# EAGLE board dc_q84 v3 (EAGLE 9.7.0)
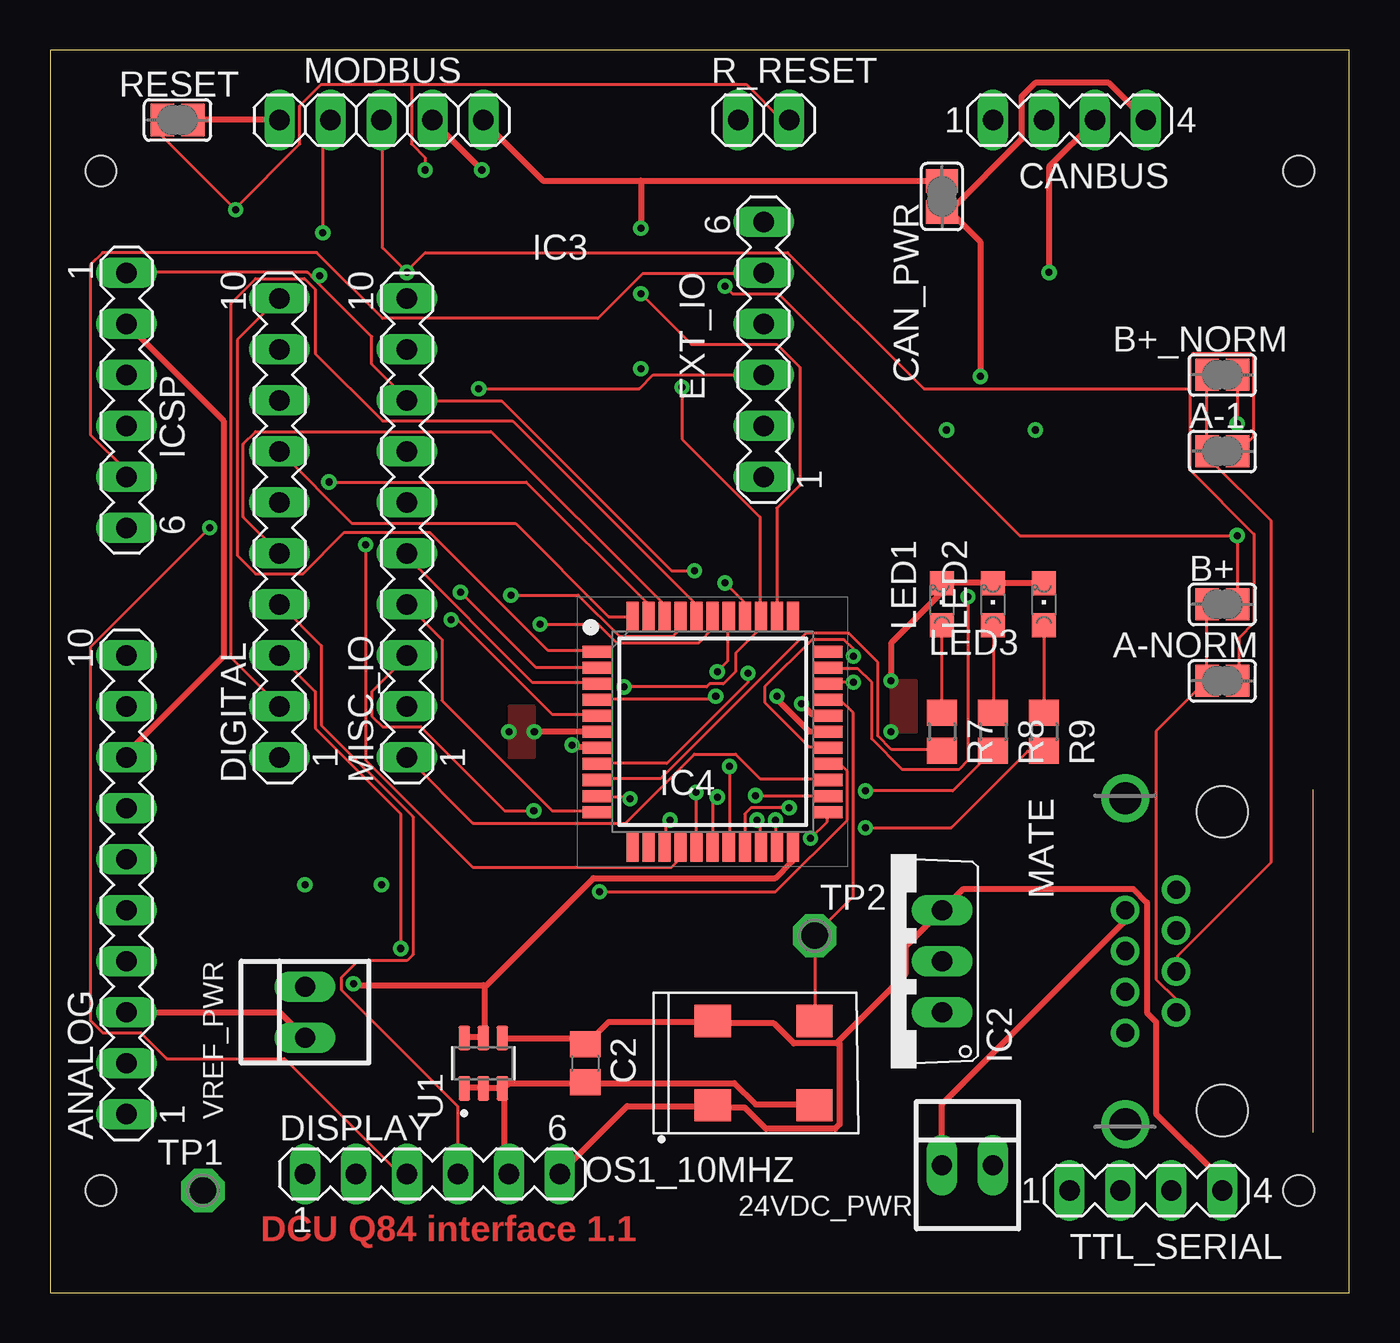
[diagram p0: board, top side]
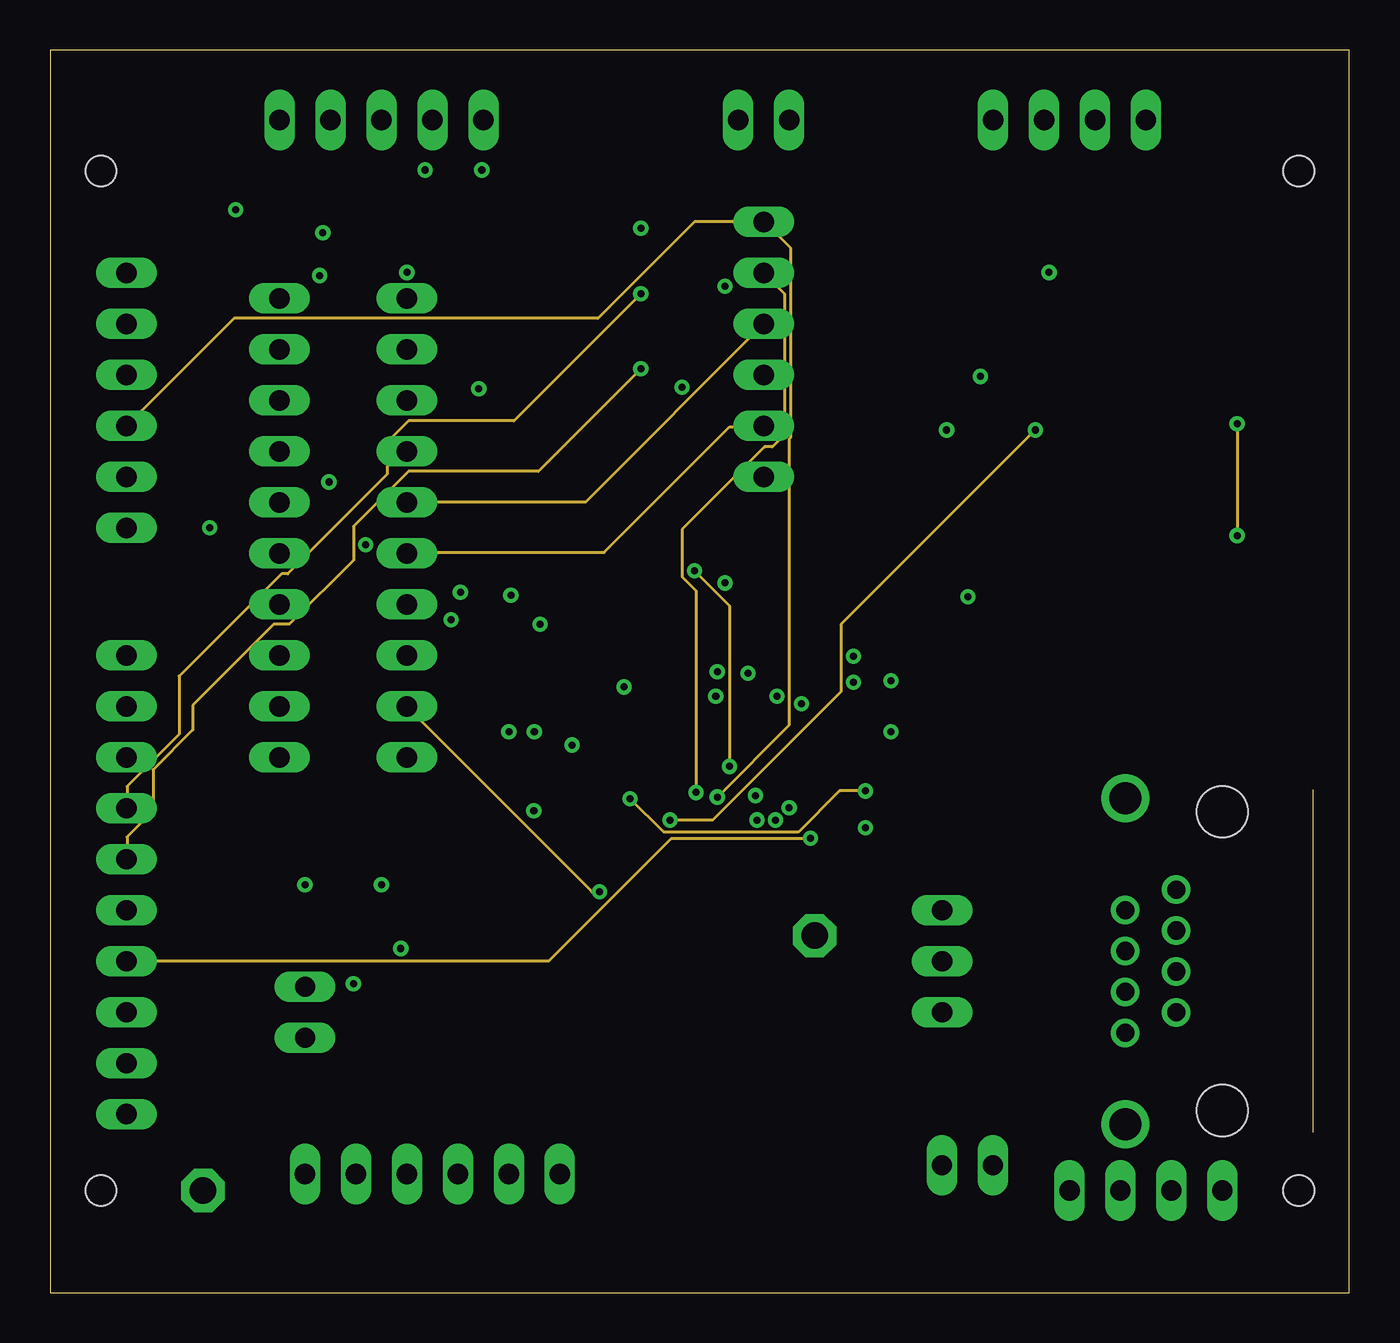
[diagram p1: board, inner layer Route2]
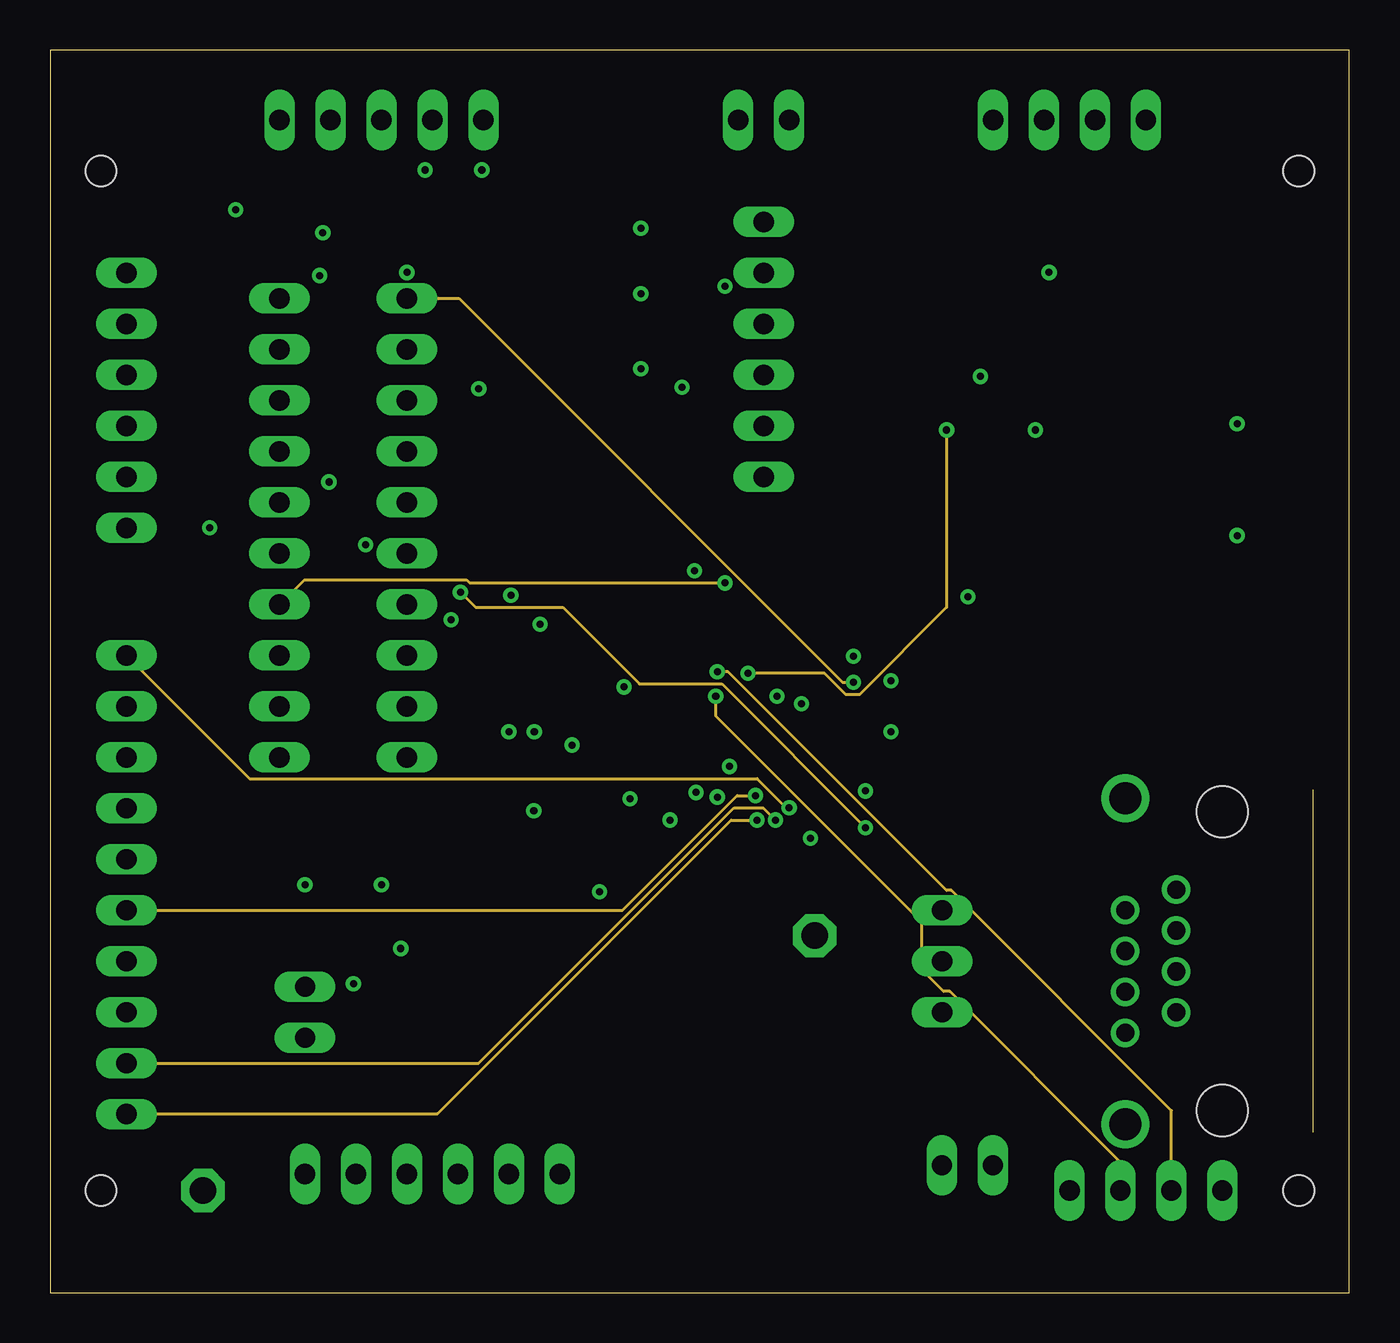
[diagram p2: board, inner layer Route15]
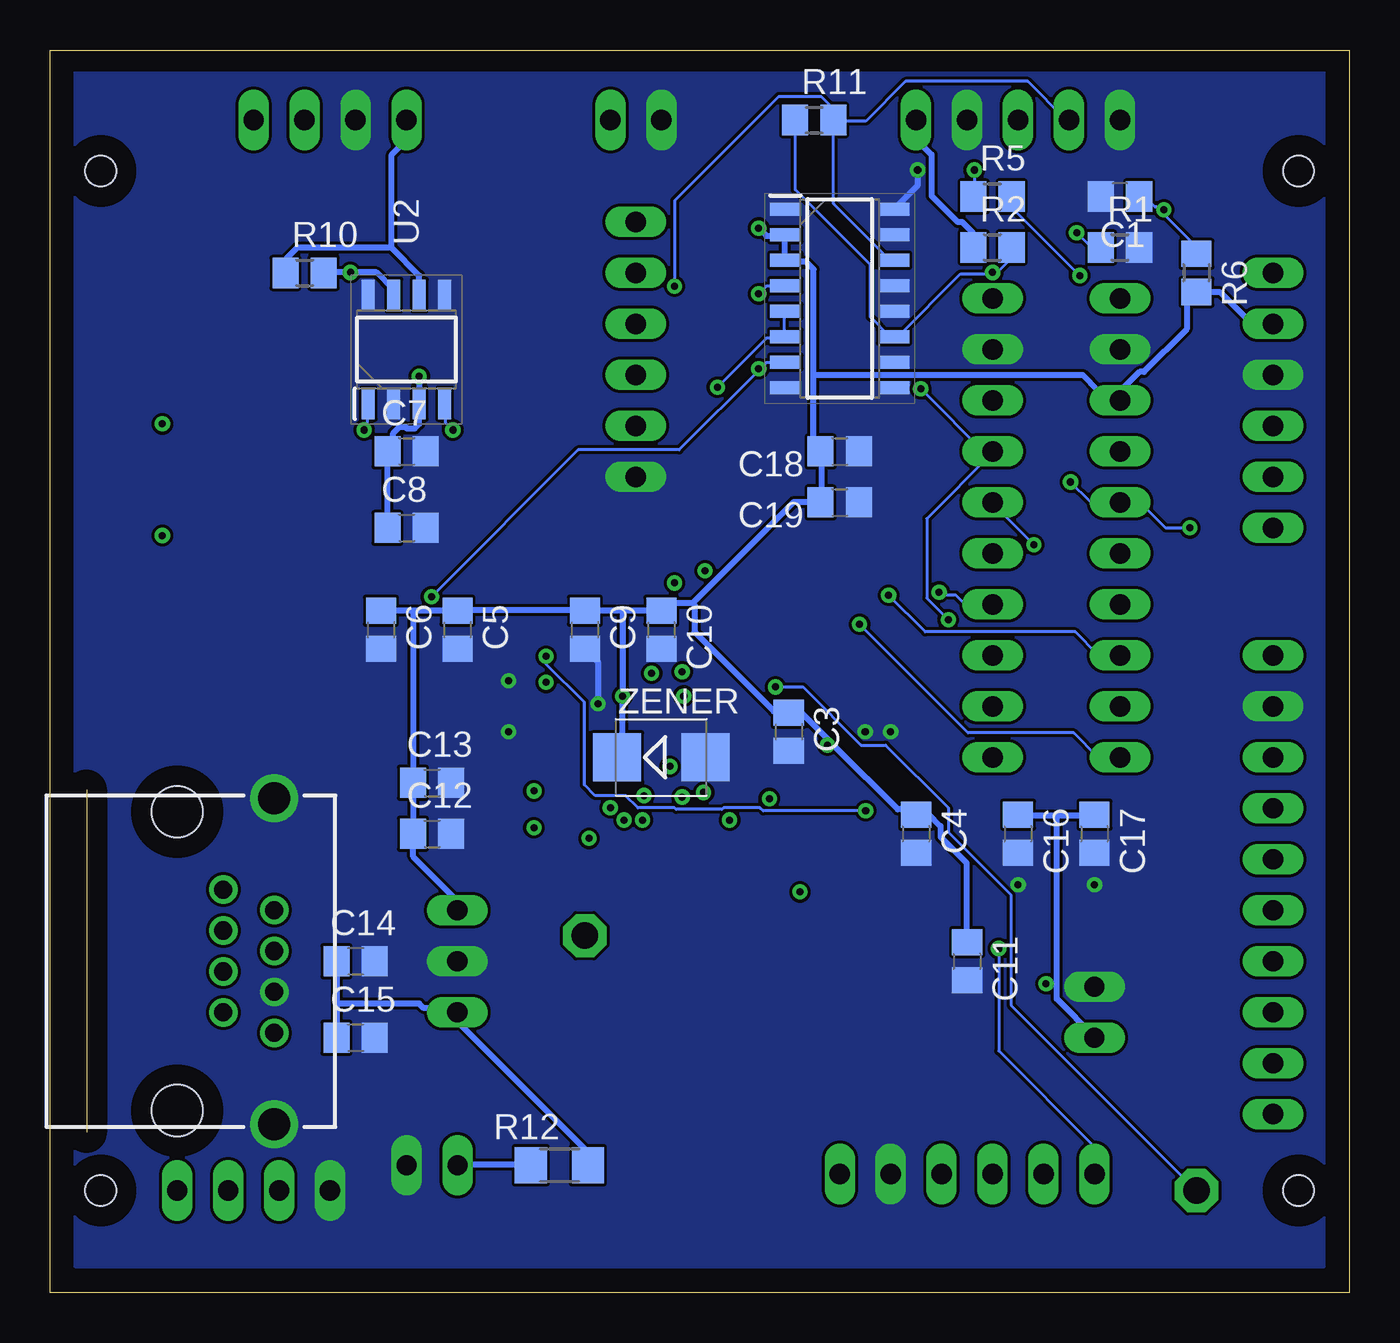
[diagram p3: board, bottom side, seen from below]

Size 64.75 x 61.9 mm. Coordinates in mm from the lower left corner, seen from the top.
Outline: 0,0 64.75,0 64.75,61.9 0,61.9 0,0
Copper layers (1+2*15+16): Top 0.035mm / dielectric 1.5mm / Route2 0.035mm / dielectric 0.15mm / Route15 0.035mm / dielectric 0.2mm / Bottom 0.035mm
Design rules "Fusion Electronics Design Rules": minimum track width 6mil, minimum drill 0.35mm, track to track 6mil, track to pad 6mil, pad to pad 6mil, via to via 6mil, smd to smd 6mil, copper to edge 40mil, drill to drill 6mil, minimum pad ring 10mil, minimum via ring 8mil, stop-mask expansion 4mil, vias tented up to drill 0mil, thermal gap 10mil
Net classes: 1 icurrent: width 0.305 mm
Holes 1.52 mm at 2.54,55.88 62.23,55.88 2.54,5.08 62.23,5.08
vRestrict: area 29.2,26.7 to 36.8,29.2

## Footprints (pad centres in the part's own frame; a part is rotated, then mirrored left to right if it is on the bottom)
22-23-2021 = drill 1 long: 1 -1.27,0; 2 1.27,0
SJ = smd 1.168 x 1.6: 1 -0.762,0; 2 0.762,0
MA10-1 = drill 1.016 long: 1 -11.43,0; 2 -8.89,0; 3 -6.35,0; 4 -3.81,0; 5 -1.27,0; 6 1.27,0; 7 3.81,0; 8 6.35,0; 9 8.89,0; 10 11.43,0
C0805 = smd 1.3 x 1.5: 1 -0.95,0; 2 0.95,0
MA04-1 = drill 1.016 long: 1 -3.81,0; 2 -1.27,0; 3 1.27,0; 4 3.81,0
MA06-1 = drill 1.016 long: 1 -6.35,0; 2 -3.81,0; 3 -1.27,0; 4 1.27,0; 5 3.81,0; 6 6.35,0
TO220V = drill 1.016 long: 1 -2.54,-2.54; 2 0,-2.54; 3 2.54,-2.54
SOIC127P600X175-16N = smd 1.525 x 0.65: 1 -2.712,4.445; 2 -2.712,3.175; 3 -2.712,1.905; 4 -2.712,0.635; 5 -2.712,-0.635; 6 -2.712,-1.905; 7 -2.712,-3.175; 8 -2.712,-4.445; 9 2.712,-4.445; 10 2.712,-3.175; 11 2.712,-1.905; 12 2.712,-0.635; 13 2.712,0.635; 14 2.712,1.905; 15 2.712,3.175; 16 2.712,4.445
QFP80P1200X1200X120-44N = smd 1.475 x 0.6: 1 -5.738,4; 2 -5.738,3.2; 3 -5.738,2.4; 4 -5.738,1.6; 5 -5.738,0.8; 6 -5.738,0; 7 -5.738,-0.8; 8 -5.738,-1.6; 9 -5.738,-2.4; 10 -5.738,-3.2; 11 -5.738,-4; 23 5.738,-4; 24 5.738,-3.2; 25 5.738,-2.4; 26 5.738,-1.6; 27 5.738,-0.8; 28 5.738,0; 29 5.738,0.8; 30 5.738,1.6; 31 5.738,2.4; 32 5.738,3.2; 33 5.738,4 | smd 0.6 x 1.475: 12 -4,-5.738; 13 -3.2,-5.738; 14 -2.4,-5.738; 15 -1.6,-5.738; 16 -0.8,-5.738; 17 0,-5.738; 18 0.8,-5.738; 19 1.6,-5.738; 20 2.4,-5.738; 21 3.2,-5.738; 22 4,-5.738; 34 4,5.738; 35 3.2,5.738; 36 2.4,5.738; 37 1.6,5.738; 38 0.8,5.738; 39 0,5.738; 40 -0.8,5.738; 41 -1.6,5.738; 42 -2.4,5.738; 43 -3.2,5.738; 44 -4,5.738
CHIPLED_0805 = smd 1.2 x 1.2: A 0,-1.05; C 0,1.05
GLX-S-88M = drill 0.9 pad 1.422: 1 -3.57,-2.3; 2 -2.55,-4.84; 3 -1.53,-2.3; 4 -0.51,-4.84; 5 0.51,-2.3; 6 1.53,-4.84; 7 2.55,-2.3; 8 3.57,-4.84 | drill 1.6 pad 2.184: S1 -8.125,-4.84; S2 8.125,-4.84 | hole 2.55: -7.44,0; 7.44,0
1X05 = drill 1.016 long: 1 -5.08,0; 2 -2.54,0; 3 0,0; 4 2.54,0; 5 5.08,0
7.2X5.2-4-PAD = smd 1.8 x 1.6: 1 -2.54,-2.1; 2 2.54,-2.1; 3 2.54,2.1; 4 -2.54,2.1
R0805 = smd 1.3 x 1.5: 1 -0.95,0; 2 0.95,0
R1206 = smd 1.6 x 1.803: 1 -1.422,0; 2 1.422,0
1X02 = drill 1.016 long: 1 -1.27,0; 2 1.27,0
P1-13 = drill 1.321 pad 2.159 octagon: TP 0,0
SOT95P280X145-6N = smd 1.21 x 0.58: 1 -1.255,0.95; 2 -1.255,0; 3 -1.255,-0.95; 4 1.255,-0.95; 5 1.255,0; 6 1.255,0.95
SOIC127P600X175-8N = smd 1.528 x 0.65: 1 -2.711,1.905; 2 -2.711,0.635; 3 -2.711,-0.635; 4 -2.711,-1.905; 5 2.711,-1.905; 6 2.711,-0.635; 7 2.711,0.635; 8 2.711,1.905
SMB = smd 2.4 x 2.4: A 2.2,0; C -2.2,0

## Placement (x,y rotation side)
24VDC_PWR  24vdc power  [22-23-2021]  45.72,6.35 0 top
A-1  A-  [SJ]  58.42,41.91 0 top
A-NORM  A-norm  [SJ]  58.42,30.48 0 top
ANALOG  Analog  [MA10-1]  3.81,20.32 90 top
B+  B+  [SJ]  58.42,34.29 0 top
B+_NORM  B+norm  [SJ]  58.42,45.72 0 top
C1  0.1uf  [C0805]  11.43,54.61 180 bottom
C2  0.1uf  [C0805]  26.67,11.43 270 top
C3  0.1uf  [C0805]  27.94,27.94 270 bottom
C4  10uf  [C0805]  21.59,22.86 270 bottom
C5  0.1uf  [C0805]  44.45,33.02 270 bottom
C6  10uf  [C0805]  48.26,33.02 270 bottom
C7  0.1uf  [C0805]  46.99,41.91 0 bottom
C8  10uf  [C0805]  46.99,38.1 0 bottom
C9  0.1uf  [C0805]  38.1,33.02 270 bottom
C10  10uf  [C0805]  34.29,33.02 270 bottom
C11  0.1uf  [C0805]  19.05,16.51 270 bottom
C12  0.1uf  [C0805]  45.72,22.86 0 bottom
C13  10uf  [C0805]  45.72,25.4 0 bottom
C14  0.1uf  [C0805]  49.53,16.51 0 bottom
C15  10uf  [C0805]  49.53,12.7 0 bottom
C16  0.1uf  [C0805]  16.51,22.86 270 bottom
C17  10uf  [C0805]  12.7,22.86 270 bottom
C18  0.1uf  [C0805]  25.4,41.91 0 bottom
C19  10uf  [C0805]  25.4,39.37 0 bottom
CAN_PWR  CAN_PWR  [SJ]  44.45,54.61 90 top
CANBUS  CANBUS  [MA04-1]  50.8,58.42 0 top
DIGITAL  Digtal  [MA10-1]  11.43,38.1 90 top
DISPLAY  DISPLAY  [MA06-1]  19.05,5.91 0 top
EXT_IO  EXT_IO  [MA06-1]  35.56,46.99 90 top
IC2  7805TV  [TO220V]  41.91,16.51 90 top
IC3  ADM3095EBRZ  [SOIC127P600X175-16N]  25.4,49.53 0 bottom
IC4  PIC18F47Q84-I_PT  [QFP80P1200X1200X120-44N]  33.02,27.94 0 top
ICSP  ICSP  [MA06-1]  3.81,44.45 270 top
LED1  run  [CHIPLED_0805]  44.45,34.29 0 top
LED2  error  [CHIPLED_0805]  46.99,34.29 0 top
LED3  comm  [CHIPLED_0805]  49.53,34.29 0 top
MATE  GLX-S-88M  [GLX-S-88M]  58.42,16.51 270 top
MISC_IO  misc-io  [MA10-1]  17.78,38.1 90 top
MODBUS  MODBUS  [1X05]  16.51,58.42 0 top
OS1_10MHZ  OSC-OE-CFPS-72  [7.2X5.2-4-PAD]  35.56,11.43 0 top
R1  680  [R0805]  11.43,52.07 0 bottom
R2  680  [R0805]  17.78,52.07 0 bottom
R5  56ohm  [R0805]  17.78,54.61 0 bottom
R6  10k  [R0805]  7.62,50.8 270 bottom
R7  1k  [R0805]  44.45,27.94 270 top
R8  1k  [R0805]  46.99,27.94 270 top
R9  1k  [R0805]  49.53,27.94 270 top
R10  120ohm  [R0805]  52.07,50.8 0 bottom
R11  120  [R0805]  26.67,58.42 0 bottom
R12  0 ohm fuse  [R1206]  39.37,6.35 180 bottom
R_RESET  remote_reset  [1X02]  35.56,58.42 0 top
RESET  reset  [SJ]  6.35,58.42 0 top
TP1  PTR1PAD1-13  [P1-13]  7.62,5.08 0 top
TP2  PTR1PAD1-13  [P1-13]  38.1,17.78 0 top
TTL_SERIAL  TTL Serial  [MA04-1]  54.61,5.08 0 top
U1  REF3440IDBVR  [SOT95P280X145-6N]  21.59,11.43 90 top
U2  TCAN330GDR  [SOIC127P600X175-8N]  46.99,46.99 90 bottom
VREF_PWR  5vdc_vref_pwr  [22-23-2021]  12.7,13.97 90 top
ZENER  5.6V  [SMB]  34.29,26.67 0 bottom

## Library data of the parts
24VDC_PWR VREF_PWR = con-molex; MF: MOLEX; MPN: 22-23-2021; OC_FARNELL: 1462926; OC_NEWARK: 25C3832
A-1 A-NORM B+ B+_NORM CAN_PWR RESET = jumper
ANALOG CANBUS DIGITAL DISPLAY EXT_IO ICSP MISC_IO TTL_SERIAL = con-lstb; OC_FARNELL: unknown; OC_NEWARK: unknown
C1-C19 = rcl; SPICEPREFIX: C
IC2 = linear
IC3 = ADM3095EBRZ; DESCRIPTION: Level 4 EMC Protected RS-485 Transceiver with Full +/-42 V Fault Protection; HEIGHT: 1.75mm; MANUFACTURER_NAME: Analog Devices; MANUFACTURER_PART_NUMBER: ADM3095EBRZ; MOUSER_PART_NUMBER: 584-ADM3095EBRZ; MOUSER_PRICE-STOCK: https://www.mouser.com/Search/Refine.aspx?Keyword=584-ADM3095EBRZ
IC4 = PIC18F47Q84-I_PT; DESCRIPTION: 8-bit Microcontrollers - MCU CAN-FD, 128KB Flash, 13KB RAM, 12b ADC3, UTMR, DAC, Comp, PWM, CCP, CWG, HLT, WWDT, SCAN/CRC, ZCD, PPS,Comms IDLE/DOZE/PMD, JTAG; HEIGHT: 1.2mm; MANUFACTURER_NAME: Microchip; MANUFACTURER_PART_NUMBER: PIC18F47Q84-I/PT; MOUSER_PART_NUMBER: 579-PIC18F47Q84-I/PT; MOUSER_PRICE-STOCK: https://www.mouser.co.uk/ProductDetail/Microchip-Technology/PIC18F47Q84-I-PT?qs=d0WKAl%252BL4KYthTnAmf%2FYSg%3D%3D
LED1-LED3 = led
MATE = con-kycon; OC_FARNELL: unknown; OC_NEWARK: unknown
MODBUS R_RESET = pinhead
OS1_10MHZ = IQD-Frequency-Products
R1 R2 R5-R12 = rcl; SPICEPREFIX: R
TP1 TP2 = testpad
U1 = REF3440IDBVR; AVAILABILITY: In Stock; DESCRIPTION: 4.1-V, low-drift, low-power, small-footprint series voltage reference; MF: Texas Instruments; MP: REF3440IDBVR; PACKAGE: SOT-23-6 Texas Instruments; PRICE: None; PURCHASE-URL: https://pricing.snapeda.com/search/part/REF3440IDBVR/?ref=eda
U2 = TCAN330GDR; DESCRIPTION: 3.3-V CAN Transceivers with CAN FD (Flexible Data Rate); HEIGHT: 1.75mm; MANUFACTURER_NAME: Texas Instruments; MANUFACTURER_PART_NUMBER: TCAN330GDR; MOUSER_PART_NUMBER: 595-TCAN330GDR; MOUSER_PRICE-STOCK: https://www.mouser.co.uk/ProductDetail/Texas-Instruments/TCAN330GDR?qs=9DwIlvx97adeWwzxdqwSPw%3D%3D
ZENER = diode

## Nets
AN0: ANALOG.10 IC4.19
AN1: ANALOG.1 IC4.20
AN2: ANALOG.2 IC4.21
AN4: ANALOG.4 IC4.23
AN5: ANALOG.5 IC4.24
CAN_N [icurrent]: CANBUS.1 R10.1 U2.6
CAN_P [icurrent]: CANBUS.3 R10.2 U2.7
CAN_VCC [icurrent]: C7.1 C8.1 CAN_PWR.1 CANBUS.4 U2.3
CANRX: IC4.8 U2.4
CANTX: IC4.14 U2.1
CLOCKO: IC4.31 MISC_IO.10
CPU_CLK: IC4.30 OS1_10MHZ.3 TP2.TP
CS: DIGITAL.3 DISPLAY.1 IC4.41
DB0: DIGITAL.1 IC4.39
DB1: DIGITAL.2 IC4.40
DERE: IC3.5 IC3.6 IC4.36 TP1.TP
DLED: IC4.2 IC4.11 MISC_IO.4 R9.2
MB_A: A-1.2 A-NORM.2 IC3.11 MODBUS.3 R2.2 R11.1
MB_B: B+.2 B+_NORM.2 IC3.14 MODBUS.2 R1.1 R11.2
MB_RX: ANALOG.6 IC3.7 IC4.32
MB_TX: ANALOG.7 IC3.4 IC4.35
MCLR_SIG: IC4.18 ICSP.1 MISC_IO.8 R5.2
MISC: IC4.26 MISC_IO.2
MLED: IC4.9 R7.2
N$1: A-NORM.1 B+.1 MATE.7
N$2 [icurrent]: C14.1 C15.1 IC2.1 R12.1
N$3: A-1.1 B+_NORM.1 MATE.5
N$4: LED1.A R7.1
N$5: LED2.A R8.1
N$6: LED3.A R9.1
PC_RX2: IC4.38 TTL_SERIAL.3
PC_TX2: IC4.4 TTL_SERIAL.2
PGC: EXT_IO.5 IC4.16 ICSP.5
PGD: EXT_IO.6 IC4.17 ICSP.4
R_RESET: C1.1 R5.1 R6.1 R_RESET.2 RESET.1
RB5: EXT_IO.4 IC4.15 MISC_IO.6
RD5: EXT_IO.2 IC4.3 MISC_IO.5
RD7: EXT_IO.3 IC4.5 MISC_IO.7
RE2: IC4.27 MISC_IO.3
RELAY: IC4.25 MISC_IO.1
RLED: IC4.10 R8.2
SCK1: DIGITAL.4 DISPLAY.4 IC4.37
SDI1: DIGITAL.5 IC4.42
SDO1: DIGITAL.6 DISPLAY.3 IC4.43
UC_RX: DIGITAL.10 IC4.1
UC_TX: DIGITAL.7 IC4.44
V+ [icurrent]: 24VDC_PWR.1 MATE.2 R12.2
VDD [icurrent]: ANALOG.8 C2.1 C3.1 C4.1 C5.1 C6.1 C9.1 C10.1 C11.1 C12.1 C13.1 C18.1 C19.1 CAN_PWR.2 DIGITAL.8 DISPLAY.6 IC2.3 IC3.2 IC3.3 IC4.7 IC4.28 ICSP.2 MODBUS.5 OS1_10MHZ.1 OS1_10MHZ.4 R2.1 R6.2 TTL_SERIAL.4 U1.4 ZENER.C
VREF [icurrent]: ANALOG.3 C16.1 C17.1 IC4.22 U1.5 U1.6 VREF_PWR.1
VSS [icurrent]: 24VDC_PWR.2 ANALOG.9 C1.2 C2.2 C3.2 C4.2 C5.2 C6.2 C7.2 C8.2 C9.2 C10.2 C11.2 C12.2 C13.2 C14.2 C15.2 C16.2 C17.2 C18.2 C19.2 CANBUS.2 DIGITAL.9 DISPLAY.5 EXT_IO.1 IC2.2 IC3.1 IC3.8 IC3.9 IC3.10 IC3.12 IC3.13 IC3.15 IC3.16 IC4.6 IC4.29 ICSP.3 LED1.C LED2.C LED3.C MATE.6 MATE.S1 MATE.S2 MISC_IO.9 MODBUS.1 MODBUS.4 OS1_10MHZ.2 R1.2 R_RESET.1 RESET.2 TTL_SERIAL.1 U1.1 U1.2 U1.3 U2.2 U2.5 U2.8 VREF_PWR.2 ZENER.A

## Tracks (layer width: path | path; a pad name or v marks a point on that pad's centre or on a via)
AN0  (via drill 0.35)
  Top 0.152: v36.83,24.16 34.92,24.16 34.62,23.85 34.62,22.25 IC4.19
  Route15 0.152: v36.83,24.16 36.68,24.16 35.23,25.6 9.93,25.6 3.84,31.7 ANALOG.10
AN1  (via drill 0.35)
  Top 0.152: v35.23,23.55 35.38,23.39 35.38,22.25 IC4.20
  Route15 0.152: v35.23,23.55 33.93,23.55 19.3,8.92 3.84,8.92 ANALOG.1
AN2  (via drill 0.35)
  Top 0.152: v36.14,23.55 36.14,22.25 IC4.21
  Route15 0.152: v36.14,23.55 35.53,24.16 34.09,24.16 21.36,11.43 ANALOG.2
AN4  (via drill 0.35)
  Top 0.152: v37.9,22.63 38.73,23.47 38.73,23.93 IC4.23
  Route2 0.152: v37.9,22.63 30.96,22.63 24.87,16.53 3.84,16.53 ANALOG.4
AN5  (via drill 0.35)
  Top 0.152: v35.15,24.77 38.73,24.77 IC4.24
  Route15 0.152: v35.15,24.77 34.24,24.77 28.52,19.05 ANALOG.5
CAN_N
  Bottom 0.305: 47.73,52.04 52.45,52.04 52.98,51.51 52.98,50.82 R10.1 | 47.73,52.04 46.36,50.67 U2.6 | 47.73,52.04 47.73,56.69 47.04,57.38 47.04,58.37 CANBUS.1
CAN_P  (via drill 0.35)
  Top 0.305: v49.78,50.82 49.78,56.08 52.07,58.37 CANBUS.3
  Bottom 0.305: R10.2 51.08,50.82 v49.78,50.82 48.49,50.82 47.65,49.99 47.65,49.76 U2.7
CAN_VCC  (via drill 0.35)
  Top 0.305: CANBUS.4 52.76,60.27 49.1,60.27 48.41,59.59 48.41,57.45 44.83,53.87 44.45,53.87 CAN_PWR.1 44.91,53.8 46.36,52.35 v46.36,45.64
  Bottom 0.305: C8.1 47.95,38.1 47.95,41.91 C7.1 47.8,41.99 47.65,42.14 47.65,42.82 47.35,43.13 47.04,43.13 46.97,43.05 46.58,43.05 46.36,43.28 U2.3 v46.36,45.64
CANRX  (via drill 0.35)
  Top 0.152: v34.77,30.86 34.77,30.4 30.73,26.36 27.31,26.36 IC4.8
  Route15 0.152: v34.77,30.86 38.58,30.86 39.65,29.79 40.34,29.79 44.68,34.14 v44.68,42.98
  Bottom 0.152: v44.68,42.98 45.06,43.36 45.06,44.27 U2.4
CANTX  (via drill 0.35)
  Top 0.152: v30.89,23.55 30.66,23.32 30.66,22.25 IC4.14
  Route2 0.152: v30.89,23.55 33.02,23.55 39.42,29.95 39.42,33.3 v49.1,42.98
  Bottom 0.152: v49.1,42.98 49.1,43.2 48.95,43.36 48.95,44.27 U2.1
CLOCKO  (via drill 0.35)
  Top 0.152: v40.03,30.4 38.81,30.4 IC4.31
  Route15 0.152: v40.03,30.4 39.5,30.4 20.37,49.53 MISC_IO.10
CPU_CLK
  Top 0.152: IC4.30 38.81,29.49 39.42,29.49 40.03,28.88 40.03,19.74 38.12,17.83 TP2.TP 38.12,17.75 38.12,13.56 OS1_10MHZ.3
CS  (via drill 0.35)
  Top 0.152: v22.96,34.75 26.31,34.75 28.37,32.69 31.04,32.69 31.42,33.07 31.42,33.6 IC4.41 | v17.48,17.14 17.48,23.85 13.21,28.12 13.21,29.95 11.45,31.7 DIGITAL.3
  Bottom 0.152: v22.96,34.75 21.13,32.92 13.67,32.92 12.52,31.77 11.45,31.77 DIGITAL.3 | v17.48,17.14 17.48,12.04 12.75,7.31 12.75,5.94 DISPLAY.1
DB0  (via drill 0.35)
  Top 0.152: IC4.39 33.02,33.07 32.33,32.38 28.22,32.38 27.31,33.3 v24.41,33.3
  Bottom 0.152: v24.41,33.3 19,27.89 13.74,27.89 12.52,26.67 DIGITAL.1
DB1
  Top 0.152: DIGITAL.2 9.02,31.62 9.02,49.3 10.24,50.52 12.67,50.52 13.21,49.99 13.21,46.79 16.56,43.43 23.04,43.43 32.18,34.29 32.18,33.68 IC4.40
DERE  (via drill 0.35)
  Top 0.152: v31.5,45.11 31.5,42.52 35.38,38.63 35.38,33.68 IC4.36 35.38,33.6 35.38,33.07 34.16,31.85 34.16,30.94 33.55,30.33 32.87,30.33 32.72,30.17 v28.6,30.17
  Bottom 0.152: v31.5,45.11 29.06,47.55 28.22,47.55 28.14,47.62 | 28.14,47.62 28.14,48.84 IC3.5 | 28.14,47.62 IC3.6 | TP1.TP 16.87,14.33 16.87,19.81 19.99,22.94 19.99,24.16 23.11,27.28 24.33,27.28 27.23,30.17 v28.6,30.17
DLED  (via drill 0.35)
  Top 0.152: MISC_IO.4 19.53,32.54 19.53,29.49 25.02,24 27.23,24 IC4.11 | v20.45,34.9 24.18,31.17 27.23,31.17 IC4.2 | v40.64,23.16 44.91,23.16 48.72,26.98 49.48,26.98 R9.2
  Route15 0.152: v40.64,23.16 33.48,30.33 29.36,30.33 25.55,34.14 21.21,34.14 v20.45,34.9
  Bottom 0.152: v20.45,34.9 20.3,34.75 19.61,34.75 19.15,34.29 MISC_IO.4
MB_A  (via drill 0.35)
  Top 0.152: 56.79,45.03 56.79,46.63 56.95,46.79 59.84,46.79 60,46.63 60,42.67 59.23,41.91 A-1.2 | 56.79,45.03 56.79,41 60,37.79 60,33.38 59.23,32.61 59.23,30.48 A-NORM.2 | MODBUS.3 16.56,58.37 16.56,52.04 v17.78,50.82 17.78,50.9 18.69,51.82 36.75,51.82 43.54,45.03 56.79,45.03
  Bottom 0.152: 17.78,50.75 19.38,50.75 22.5,47.62 IC3.11 22.89,47.62 23.88,48.62 23.88,51.21 27.61,54.94 27.61,58.37 R11.1 | 17.78,50.75 17.63,50.75 16.87,51.51 16.87,52.04 R2.2 | 17.78,50.75 v17.78,50.82
MB_B  (via drill 0.35)
  Top 0.152: v59.16,43.28 59.16,45.72 B+_NORM.2 | B+.2 59.16,34.29 v59.16,37.72 48.34,37.72 36.3,49.76 34.01,49.76 v33.63,50.14 | v13.59,52.81 13.59,57.99 13.97,58.37 MODBUS.2
  Route2 0.152: v59.16,43.28 v59.16,37.72
  Bottom 0.152: IC3.14 22.89,51.43 25.7,54.25 25.7,58.37 R11.2 | v13.59,52.81 12.9,52.12 12.45,52.12 R1.1 | R11.2 25.63,58.37 24.11,58.37 22.12,60.35 16.03,60.35 14.12,58.45 13.97,58.45 MODBUS.2 | v33.63,50.14 33.63,54.41 28.45,59.59 26.31,59.59 25.78,59.05 25.78,58.45 R11.2
MB_RX  (via drill 0.35)
  Top 0.152: v45.75,34.67 45.75,26.52 45.29,26.06 42.47,26.06 40.95,27.58 40.95,30.4 40.26,31.09 38.81,31.09 IC4.32
  Route2 0.152: v29.44,46.02 24.33,40.92 17.86,40.92 15.11,38.18 15.11,36.5 11.91,33.3 11.15,33.3 7.11,29.26 7.11,28.04 5.13,26.06 5.13,24 3.84,22.71 3.84,21.64 ANALOG.6
  Bottom 0.152: v45.75,34.67 38.43,41.99 33.4,41.99 29.4,45.99 | 29.4,45.99 29.06,46.33 28.14,46.33 IC3.7 | v29.44,46.02 29.4,45.99
MB_TX  (via drill 0.35)
  Top 0.152: v29.44,49.76 31.95,47.24 36.22,47.24 37.36,46.1 37.36,40.23 36.22,39.09 IC4.35
  Route2 0.152: v29.44,49.76 23.11,43.43 17.86,43.43 16.79,42.37 16.79,40.77 11.84,35.81 11.53,35.81 6.43,30.71 6.43,27.81 3.84,25.22 3.84,24.16 ANALOG.7
  Bottom 0.152: v29.44,49.76 29.06,50.14 28.14,50.14 IC3.4
MCLR_SIG  (via drill 0.35)
  Top 0.152: v33.86,26.21 33.86,22.25 IC4.18 | v32.11,35.97 30.96,35.97 22.5,44.42 17.78,44.42 MISC_IO.8 17.78,44.5 16.03,46.25 16.03,47.62 13.21,50.44 | 13.21,50.44 12.83,50.82 3.84,50.82 ICSP.1 | 13.21,50.44 v13.44,50.67
  Route2 0.152: v33.86,26.21 33.86,34.21 v32.11,35.97
  Bottom 0.152: 4.75,50.82 3.84,50.82 ICSP.1 | 16.79,54.63 R5.2 16.79,54.56 16.79,54.03 v13.44,50.67
MISC  (via drill 0.35)
  Top 0.152: v27.38,19.96 36.14,19.96 39.73,23.55 39.73,25.98 39.42,26.29 38.81,26.29 IC4.26
  Route2 0.152: v27.38,19.96 27,19.96 17.78,29.18 MISC_IO.2
MLED
  Top 0.152: IC4.9 27.31,25.6 30.43,25.6 37.67,32.84 39.8,32.84 41.25,31.39 41.25,27.74 41.94,27.05 44.45,27.05 R7.2
N$1
  Top 0.152: 57.63,30.48 57.63,34.29 B+.1 | 57.63,30.48 55.12,27.96 55.12,15.62 56.11,14.63 56.11,14.02 MATE.7 | 57.63,30.48 A-NORM.1
N$2
  Bottom 0.305: 50.47,14.4 50.47,16.46 C14.1 | 50.47,14.4 50.47,12.72 C15.1 | R12.1 37.97,6.4 37.97,7.01 44.45,13.49 IC2.1 44.53,14.1 44.6,14.17 46.13,14.17 46.36,14.4 50.47,14.4
N$3
  Top 0.152: B+_NORM.1 57.63,45.72 57.63,41.91 A-1.1 57.71,41.91 57.71,41.6 60.83,38.48 60.83,21.41 56.19,16.76 56.19,16 MATE.5
N$4
  Top 0.152: R7.1 LED1.A
N$5
  Top 0.152: LED2.A 47.04,33.22 47.04,28.96 R8.1
N$6
  Top 0.152: LED3.A 49.56,33.22 49.56,28.96 R9.1
PC_RX2  (via drill 0.35)
  Top 0.152: v33.25,30.94 33.78,31.47 33.78,33.6 IC4.38
  Route15 0.152: v33.25,30.94 33.78,30.94 44.68,20.04 44.91,20.04 55.88,9.07 TTL_SERIAL.3
PC_TX2  (via drill 0.35)
  Top 0.152: v33.17,29.72 33.02,29.57 27.31,29.57 IC4.4
  Route15 0.152: v33.17,29.72 33.17,28.73 43.46,18.44 43.46,16.08 44.53,15.01 44.83,15.01 53.29,6.55 53.29,5.1 TTL_SERIAL.2
PGC  (via drill 0.35)
  Top 0.152: v32.18,24.92 32.18,22.25 IC4.16 | ICSP.5 3.76,40.69 3.76,41 2.01,42.75 2.01,51.21 2.62,51.82 13.28,51.82 16.56,48.54 27.31,48.54 29.52,50.75 35.53,50.75 EXT_IO.5
  Route2 0.152: v32.18,24.92 32.18,34.98 31.5,35.66 31.5,38.02 35.61,42.14 35.99,42.14 36.6,42.75 36.6,49.76 EXT_IO.5
PGD  (via drill 0.35)
  Top 0.152: IC4.17 33.02,24.46 v33.25,24.69
  Route2 0.152: v33.25,24.69 36.83,28.27 36.83,42.52 36.91,42.6 36.91,52.04 35.61,53.34 EXT_IO.6 32.11,53.34 27.31,48.54 9.17,48.54 ICSP.4
R_RESET  (via drill 0.35)
  Top 0.152: RESET.1 5.59,57.61 v9.25,53.95 9.25,54.03 12.45,57.23 12.45,59.13 13.51,60.2 18.01,60.2 | 18.01,60.2 34.7,60.2 36.45,58.45 36.83,58.45 R_RESET.2 | v18.69,55.93 18.69,56.54 18.01,57.23 18.01,60.2
  Bottom 0.152: 7.65,52.12 7.65,51.82 R6.1 7.65,52.12 | 10.16,54.56 10.47,54.56 C1.1 | 10.16,54.56 10.08,54.56 | 18.69,54.03 18.69,54.56 R5.1 18.69,54.63 v18.69,55.93 | 10.69,54.56 10.54,54.56 C1.1 | 9.36,53.84 v9.25,53.95 | 7.65,52.12 9.32,53.8 v9.25,53.95 | 10.16,54.56 9.7,54.1 9.63,54.1 9.4,53.87 v9.25,53.95 | 10.16,54.56 C1.1
RB5  (via drill 0.35)
  Top 0.152: v15.72,37.26 15.72,26.52 21.06,21.18 30.96,21.18 31.42,21.64 31.42,22.17 IC4.15
  Route2 0.152: EXT_IO.4 26.7,39.39 17.78,39.39 MISC_IO.6
  Bottom 0.152: v15.72,37.26 17.78,39.32 MISC_IO.6
RD5
  Top 0.152: MISC_IO.5 17.78,36.65 24.03,30.4 27.23,30.4 IC4.3
  Route2 0.152: EXT_IO.2 35.53,43.13 33.86,43.13 27.61,36.88 17.78,36.88 MISC_IO.5
RD7  (via drill 0.35)
  Top 0.152: v19.99,33.53 20.3,33.53 25.02,28.8 27.23,28.8 IC4.5 | EXT_IO.3 30.05,45.72 29.36,45.03 v21.36,45.03
  Bottom 0.152: v19.99,33.53 21.06,34.59 21.06,38.56 17.78,41.83 MISC_IO.7 18.01,41.68 v21.36,45.03
RE2  (via drill 0.35)
  Top 0.152: v40.03,31.7 40.03,32.08 39.57,32.54 37.97,32.54 35.61,30.17 35.61,29.41 37.82,27.2 38.73,27.2 IC4.27 | v24.11,24 22.66,24 18.47,28.19 16.56,28.19 16.03,28.73 16.03,29.95 17.78,31.7 MISC_IO.3
  Bottom 0.152: v40.03,31.7 40.03,31.32 38.12,29.41 38.12,25.3 37.59,24.77 36.07,24.77 35.46,24.16 33.63,24.16 33.55,24.08 31.27,24.08 31.19,24.16 29.36,24.16 29.21,24 v24.11,24
RELAY
  Top 0.152: MISC_IO.1 21.06,23.39 28.68,23.39 32.11,26.82 34.16,26.82 35.38,25.6 38.73,25.6 IC4.25
RLED  (via drill 0.35)
  Top 0.152: v28.91,24.61 28.83,24.69 27.31,24.69 IC4.10 | v40.64,24.99 44.98,24.99 46.97,26.98 R8.2
  Route2 0.152: v28.91,24.61 30.58,22.94 37.29,22.94 39.34,24.99 v40.64,24.99
SCK1  (via drill 0.35)
  Top 0.152: v33.63,35.36 34.54,34.44 34.54,33.68 IC4.37 | DISPLAY.4 20.3,5.94 20.3,9.3 14.5,15.09 14.5,15.7 15.34,16.53 17.78,16.53 18.09,16.84 18.09,23.7 13.51,28.27 13.51,32.23 11.45,34.29 DIGITAL.4
  Route15 0.152: v33.63,35.36 20.9,35.36 20.75,35.51 12.67,35.51 11.45,34.29 DIGITAL.4
SDI1
  Top 0.152: DIGITAL.5 9.63,38.63 9.63,42.29 10.24,42.9 21.97,42.9 30.58,34.29 30.58,33.68 IC4.42
SDO1  (via drill 0.35)
  Top 0.152: v13.89,40.39 23.72,40.39 29.82,34.29 IC4.43 | v7.95,38.1 2.01,32.16 2.01,13.56 2.62,12.95 4.52,12.95 5.82,11.66 11.68,11.66 17.4,5.94 17.78,5.94 DISPLAY.3
  Bottom 0.152: v13.89,40.39 12.9,39.39 11.45,39.39 DIGITAL.6 11.38,39.32 10.39,39.32 9.17,38.1 v7.95,38.1
UC_RX
  Top 0.152: IC4.1 27.23,32 24.79,32 18.92,37.87 14.66,37.87 12.6,35.81 10.24,35.81 9.32,36.73 9.32,47.47 11.38,49.53 DIGITAL.10
UC_TX
  Top 0.152: IC4.44 28.98,33.68 27.84,33.68 23.19,38.33 15.04,38.33 11.45,41.91 DIGITAL.7
V+
  Top 0.305: 24VDC_PWR.1 44.45,9.37 53.52,18.44 53.52,19.05 MATE.2
  Bottom 0.305: R12.2 40.79,6.4 44.45,6.4 24VDC_PWR.1
VDD  (via drill 0.35)
  Top 0.305: DISPLAY.6 25.4,5.94 28.75,9.3 33.02,9.3 OS1_10MHZ.1 33.1,9.22 34.62,9.22 35.69,8.15 39.12,8.15 39.34,8.38 39.34,12.42 39.27,12.5 | U1.4 22.58,12.65 26.39,12.65 26.62,12.42 C2.1 26.77,12.42 27.84,13.49 33.02,13.49 OS1_10MHZ.4 33.1,13.41 36.07,13.41 37.06,12.42 39.19,12.42 39.27,12.5 | TTL_SERIAL.4 58.4,5.1 58.4,5.64 55.12,8.92 55.12,13.49 54.66,13.94 54.66,19.43 53.98,20.12 45.52,20.12 IC2.3 42.62,17.22 42.62,15.85 39.27,12.5 | ICSP.2 8.64,43.43 8.64,31.7 3.84,26.9 3.84,26.67 ANALOG.8 | 29.44,55.4 24.56,55.4 21.59,58.37 MODBUS.5 | 29.44,55.4 44.45,55.4 CAN_PWR.2 | 29.44,55.4 v29.44,53.04 | v26.01,27.28 26.09,27.2 27.23,27.2 IC4.7 | v36.22,29.72 36.22,29.57 37.82,27.96 38.73,27.96 IC4.28
  Bottom 0.305: IC2.3 44.45,19.51 46.66,21.72 46.66,22.78 C12.1 46.66,25.38 C13.1 46.66,25.53 46.66,33.98 | ICSP.2 3.84,48.31 4.9,48.31 6.43,49.84 7.57,49.84 R6.2 7.72,49.76 8.1,49.38 8.1,48.01 10.24,45.87 10.47,45.87 11.38,44.96 11.38,44.5 DIGITAL.8 11.45,44.96 12.52,44.96 13.28,45.72 26.7,45.72 | MODBUS.5 21.59,57.45 20.83,56.69 20.83,54.63 19.53,53.34 19.3,53.34 18.77,52.81 18.77,52.12 R2.1 | v29.44,53.04 29.06,52.65 28.3,52.65 IC3.2 28.14,52.65 28.14,51.43 IC3.3 27.99,51.36 27.08,51.36 26.7,50.98 26.7,45.72 | C11.1 19.08,17.53 19.08,21.41 20.37,22.71 20.37,23.24 20.98,23.85 21.59,23.85 C4.1 21.67,23.93 21.82,24.08 22.5,24.08 25.63,27.2 25.93,27.2 v26.01,27.28 26.01,27.58 27.31,28.88 27.92,28.88 C3.1 28.07,28.96 28.68,28.96 32.64,32.92 32.64,34.29 32.72,34.37 | ZENER.C 36.45,26.67 36.22,26.9 v36.22,29.72 36.22,33.98 | 46.66,33.98 48.26,33.98 C6.1 | 46.66,33.98 44.45,33.98 C5.1 44.37,33.98 38.2,33.98 C9.1 38.05,33.98 36.22,33.98 | 36.22,33.98 34.31,33.98 C10.1 34.16,34.06 33.86,34.37 32.72,34.37 | 32.72,34.37 27.69,39.39 26.47,39.39 C19.1 26.31,39.39 26.31,41.91 C18.1 26.47,41.99 26.7,42.21 26.7,45.72
VREF  (via drill 0.35)
  Top 0.305: U1.6 20.68,12.72 21.59,12.72 U1.5 21.67,12.8 21.67,15.24 | 21.67,15.24 27.08,20.65 36.14,20.65 36.98,21.49 36.98,22.17 IC4.22 | VREF_PWR.1 11.45,13.94 3.84,13.94 ANALOG.3 | v15.11,15.39 15.19,15.32 21.59,15.32 21.67,15.24
  Bottom 0.305: 14.58,23.77 16.48,23.77 C16.1 | 14.58,23.77 12.75,23.77 C17.1 | 14.58,15.39 14.58,14.63 12.67,12.72 VREF_PWR.1 | 14.58,15.39 14.58,23.77 | 14.58,15.39 v15.11,15.39
VSS  (via drill 0.35)
  Top 0.305: U1.1 20.68,10.21 21.59,10.21 U1.2 21.67,10.21 22.5,10.21 U1.3 | U1.3 22.66,10.21 22.89,10.44 26.62,10.44 C2.2 26.77,10.44 34.09,10.44 35.15,9.37 38.05,9.37 OS1_10MHZ.2 | LED3.C 49.48,35.36 47.12,35.36 LED2.C 46.97,35.36 44.45,35.36 LED1.C 44.37,35.2 44.37,34.82 41.94,32.38 41.94,30.48 v41.91,30.48 | IC4.6 27.23,27.96 24.18,27.96 v24.13,27.94 | v37.44,29.34 37.97,28.8 38.73,28.8 IC4.29 | RESET.2 7.11,58.45 11.38,58.45 MODBUS.1 | U1.3 22.66,10.06 22.66,6.1 22.81,5.94 DISPLAY.5 | v21.51,55.93 19.08,58.37 MODBUS.4
  Bottom 0.305: v37.44,29.34 37.44,31.39 38.05,32 C9.2 | v21.51,55.93 21.51,55.17 22.66,54.03 IC3.16
  other vias: 12.7,20.32 16.51,20.32 22.86,27.94 41.91,27.94
  pour Bottom (no thermals): 1.27,1.27 63.5,1.27 63.5,60.96 1.27,60.96
  pour Top (no thermals): 41.91,27.94 43.18,27.94 43.18,30.48 41.91,30.48
  pour Top (no thermals): 22.86,26.67 24.13,26.67 24.13,29.21 22.86,29.21

## Text on the board
Top: DCU Q84 interface 1.1